# Altium PCB ETS_v8-nordic-split_1-sided-HV.PcbDoc
Units mil, origin at the board's own origin, x right, y up, seen from the top; angles counter-clockwise.
Board outline 582.68 x 326.77 mil, 2 copper layers (Top Layer, Bottom Layer), stack 62.8 mil thick; 14 components, 30 nets, 50 pads, 16 vias.
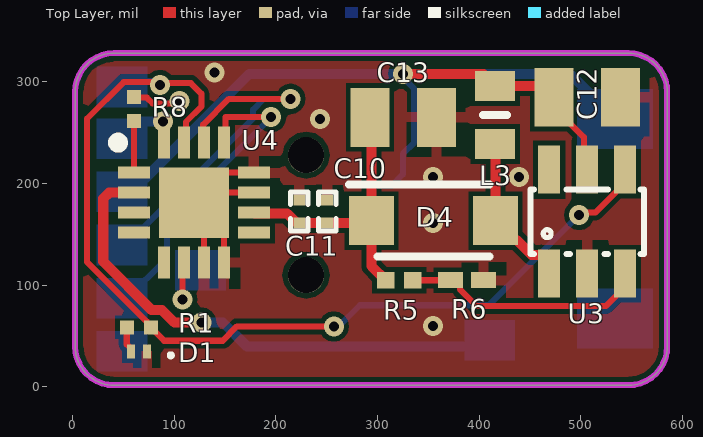
[diagram p0: Top Layer view]
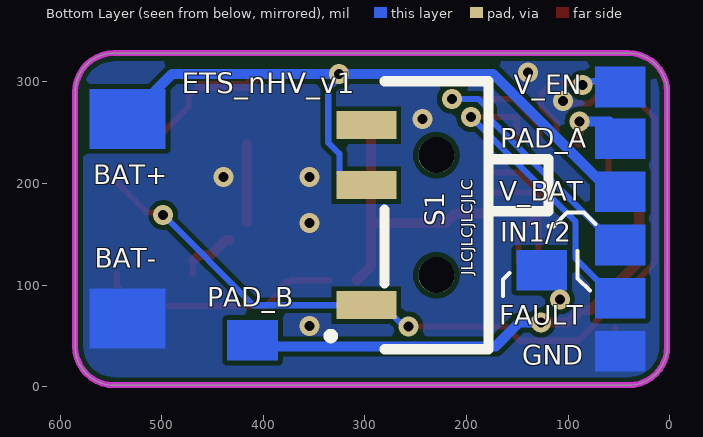
[diagram p1: Bottom Layer view, seen from below]
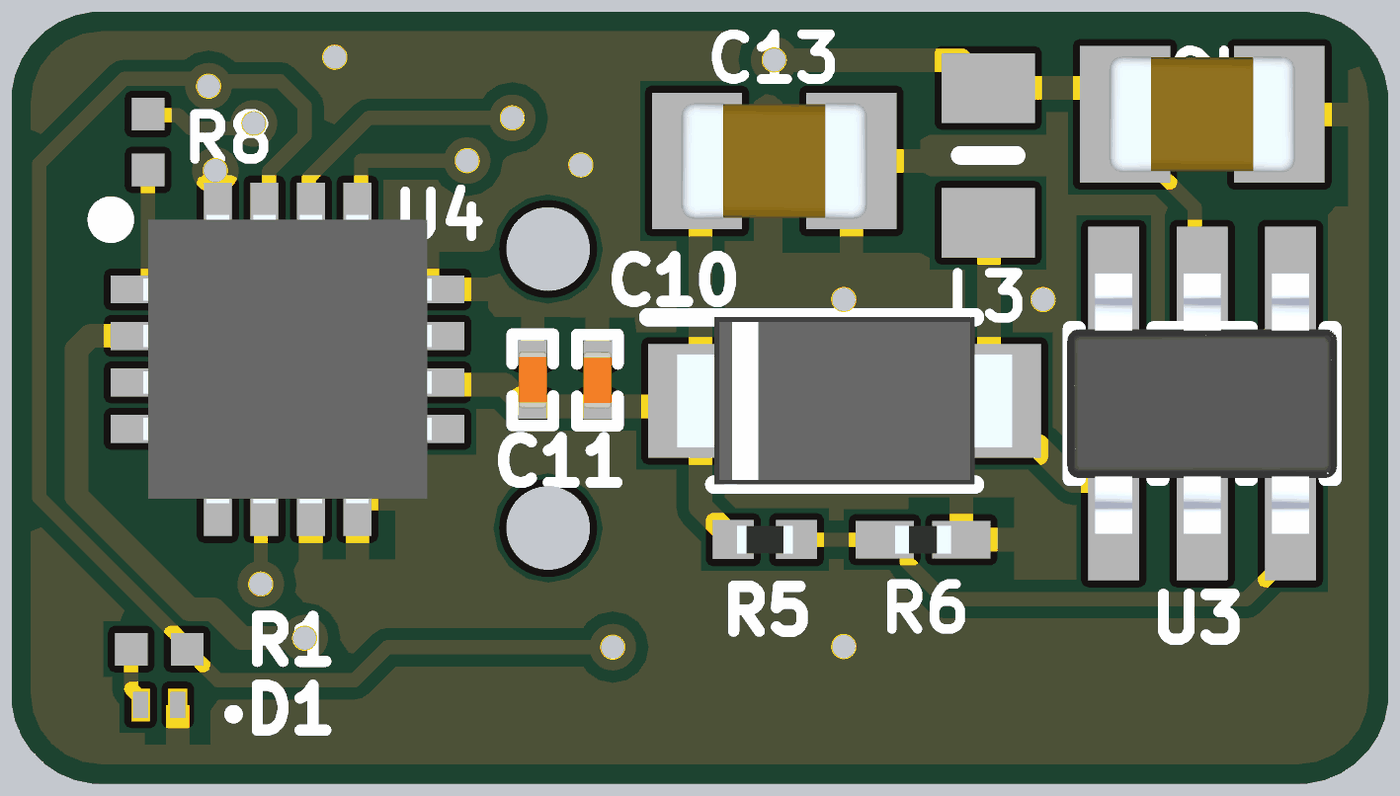
[diagram p2: 3D render of the assembled board from above, using the file's embedded part models]

## Layer stack, top to bottom
Top Solder: solder mask 0.4, Solder Resist, Dk 3.5
Top Layer: signal copper 1.4
Dielectric1: core 60, FR-4, Dk 4.8
Bottom Layer: signal copper 1.4
Bottom Solder: solder mask 0.4, Solder Resist, Dk 3.5

## Board outline
2.52,39.62 2.52,290.13 cw(c40.65,290.13) 40.65,328.26 547.08,328.26 cw(c547.08,290.13) 585.2,290.13 585.2,39.62 cw(c547.07,39.62) 547.07,1.49 40.65,1.49 cw(c40.65,39.62)

## Design rules (kind name [scope] priority, off if disabled: settings)
Clearance Polygon_ANT [(InNamedPolygon('Top_Layer-GND')) or (InNamedPolygon('Bottom_Layer-GND')) vs InNet('RF')] p1: gap=5 ignorepadtopadclearanceinfootprint=FALSE except(0: Arc-Hole Track-Hole SMDPad-Hole THPad-Hole Via-Hole Fill-Hole Poly-Hole Region-Hole Text-Hole)
Clearance Polygon [(InNamedPolygon('Top_Layer-GND')) or (InNamedPolygon('Bottom_Layer-GND')) or (InNamedPolygon('Mid_Layer_1-GND')) or (InNamedPolygon('Mid_Layer_2-GND'))] p2: gap=8 ignorepadtopadclearanceinfootprint=FALSE except(0: Arc-Hole Track-Hole SMDPad-Hole THPad-Hole Via-Hole Fill-Hole Poly-Hole Region-Hole Text-Hole)
Clearance [All] p3: gap=5 ignorepadtopadclearanceinfootprint=FALSE except(3.5: Arc-Arc Arc-Track Track-Track)
ComponentClearance [All] p1 off: gap=10 collisioncheckmode=3 verticalgap=10 showdistances=FALSE
FabricationTestPointUsage TestPointUsage [All] p1: valid=0 allowmultiple=FALSE
FabricationTestpoint Testpoint [All] p1: side=3 testpointundercomponent=TRUE minsize=40 maxsize=100 preferedsize=60 minholesize=0 maxholesize=40 preferedholesize=32 testpointgrid=1 allowsidetop=TRUE allowsidebottom=TRUE usegrid=TRUE gridtolerance=0.01
Height [All] p1 off: minheight=0 maxheight=1000 prefheight=500
HoleSize [All] p1: absolutevalues=TRUE maxlimit=248.03 minlimit=7.87 maxpercent=80.000 minpercent=20.000
HoleToHoleClearance [All] p1 off: gap=3 allowstackedmicrovias=FALSE
MinimumAnnularRing [All] p1 off: minimumring=3
PolygonConnect PolygonConnect_1 [isVia and innet(gnd)] p1: connectstyle=Direct reliefconductorwidth=10 reliefentries=4 polygonreliefangle="90 Angle" airgapwidth=10
PolygonConnect [All] p2: connectstyle=Relief reliefconductorwidth=10 reliefentries=4 polygonreliefangle="90 Angle" airgapwidth=10
RoomDefinition ETS_v8-nordic-split [InComponentClass('ETS_v8-nordic-split')] p1: confinementstyle=ConfineIn formatcopy=TRUE lockcomponents=FALSE outline -40.78,-120.56 628.51,-120.56 628.51,388.26 -40.78,388.26
RoutingVias [All] p1: holewidth=16 width=32 viastyle="Through Hole" minholewidth=3.94 minwidth=9.84 maxholewidth=28 maxwidth=50
SilkToSolderMaskClearance SilkscreenOverComponentPads [IsPad] p1: minsilkscreentomaskgap=10 clearancetoexposedcopper=TRUE
SolderMaskExpansion [All] p1: expansion=3 istentingtop=FALSE
Width [All] p1: maxlimit=100 minlimit=5 preferedwidth=6 minimp=50.000000 maximp=50.000000 favimp=50.000000
23 further rules are at their usual default settings.

## Components (designator, comment, footprint, x,y, rotation, side; value= is the part's Value field where it differs from the comment)
C10 "100nF" CAPC0603X03L_C 250.56,172.35 r90 top
C11 "100nF" CAPC0603X03L_C 223.2,172.45 r270 top
C12 "22uF" CAPC2012X145N 506.46,284.84 r0 top
C13 "22uF" CAPC2012X145N 325.36,265.11 r0 top
D1 "APG0603VGC-TT-5MAV" LED_APG0603SEC-E-TT 65.09,34.84 r180 top
D4 "SS34FA" SODFL3618X143N 355.17,163.55 r0 top
L3 "LQM18PH4R7MFRL" LQW18CA32NJ00D 415.91,267.47 r270 top
R1 "60R 1% 0201(0603)" RESC0201(0603)_L 65.09,58.46 r180 top value="1.00 Ohm"
R5 "10kR" RESC0603X26N 321.42,104.8 r180 top
R6 "4.7kR" RESC0603X28N 388.35,104.8 r180 top
R8 "120mR 1% 0201(0603)" RESC0201(0603)_L 60.41,273.14 r90 top value="1.00 Ohm"
S1 "SSSS810701" SSSS810701 298.6,198.32 r90 bottom
U3 "" *SOT23-6 506.46,162.41 r0 top
U4 "DRV8847RTER" QFN50P300X300X80-17N-D 119.46,181.2 r0 top

## Footprints (in the part's own frame and the unit in brackets; to place one, negate y for a bottom-side part, rotate by r counter-clockwise, add the part's x,y. Pads: shape width x height; smd on the part's side, far side on the other; paste and mask are expansions set on the pad)
*SOT23-6 [mm]
  rect 0.55x1.2 smd: 1(-0.95,-1.3) 2(0,-1.3) 3(0.95,-1.3) 4(0.95,1.3) 5(0,1.3) 6(-0.95,1.3)
  silkscreen extent -1.42,-0.81 1.42,0.81, body extent -1.45,-1.4 1.45,1.4, height 1.45
CAPC0603X03L_C [mm]
  rect 0.27x0.3 smd: 1(-0.285,0) 2(0.285,0)
  silkscreen extent -0.49,-0.22 0.49,0.22, body extent -0.3,-0.15 0.31,0.15, height 0.3
CAPC2012X145N [mm]
  rect 0.97x1.47 smd: 1(-0.83,0) 2(0.83,0)
  body extent -1,-0.63 1,0.63, height 1.45
LED_APG0603SEC-E-TT [mm]
  rect 0.2x0.35 smd paste-1: A(0.2,0) C(-0.2,0)
  silkscreen extent -0.85,0.05 -0.75,0.15
LQW18CA32NJ00D [mm]
  rect 0.75x1 smd: 1(-0.725,0) 2(0.725,0)
  silkscreen extent 0,-0.3 0,0.3
QFN50P300X300X80-17N-D [mm]
  rect 0.8x0.3 smd: 1(-1.5,0.75) 2(-1.5,0.25) 3(-1.5,-0.25) 4(-1.5,-0.75) 9(1.5,-0.75) 10(1.5,-0.25) 11(1.5,0.25) 12(1.5,0.75)
  rect 0.3x0.8 smd: 5(-0.75,-1.5) 6(-0.25,-1.5) 7(0.25,-1.5) 8(0.75,-1.5) 13(0.75,1.5) 14(0.25,1.5) 15(-0.25,1.5) 16(-0.75,1.5)
  rect 1.76x1.76 smd: 17(0,0)
  silkscreen extent -2.02,1.38 -1.77,1.62, body extent -1.55,-1.55 1.55,1.55, height 0.8
RESC0201(0603)_L [mm] "Chip Resistor, Body 0.6x0.3mm, IPC High Density"
  rect 0.35x0.35 smd: 1(-0.3,0) 2(0.3,0)
  body extent -0.31,-0.16 0.31,0.16, height 0.3
RESC0603X26N [mm]
  rect 0.44x0.42 smd: 1(-0.34,0) 2(0.34,0)
  body extent -0.3,-0.15 0.3,0.15, height 0.26
RESC0603X28N [mm]
  rect 0.625x0.4 smd: 1(-0.412,0) 2(0.412,0)
  body extent -0.3,-0.15 0.3,0.15, height 0.28
SODFL3618X143N [mm]
  rect 1.12x1.22 smd: 1(-1.55,0) 2(1.55,0)
  silkscreen extent -2.11,-0.9 1.4,0.9, body extent -1.8,-0.9 1.8,0.9, height 1.43
SSSS810701 [mm]
  rect 0.7x1.5 smd: 1(-3,0) 2(0,0) 3(1.5,0)
  round 0.9 hole 0.9 unplated: 4(-2.25,-1.75) 5(0.75,-1.75)
  silkscreen extent -4.1,-4.55 2.6,0.94

## Part data
C10: "Capacitor, X5R, ±10%", Part Number=C0201-100n, Footprint Doc=0201, LatestRevisionDate=2017-11-09, Pin Count=2, Published=2014-11-13, Publisher="Nordic Semiconductor"
C11: library part GRM188R61C106KAALD, "Capacitor", Manufacturer_Name="Murata Electronics", Datasheet Link=https://psearch.en.murata.com/capacitor/product/GRM188R61C106KAAL%23.html, Height=0.9mm, Manufacturer_Part_Number=GRM188R61C106KAALD
C12 C13: library part GRM21BR61E226ME44K, "Capacitor", Manufacturer_Name="Murata Electronics", Datasheet Link=http://www.murata.com/~/media/webrenewal/support/library/catalog/products/capacitor/mlcc/c02e.pdf, Height=1.45mm, Manufacturer_Part_Number=GRM21BR61E226ME44K
D1: library part APG0603SEC-E-TT, "Green 527nm LED Indication - Discrete 3V 2-SMD, 0201", Package="0201 Kingbright", Availability=Unavailable, MF=Kingbright, MP=APG0603SEC-E-TT, Price=None, SnapEDA_Link=https://www.snapeda.com/parts/APG0603SEC-E-TT/Kingbright/view-part/2754377/?ref=snap
D4: "Schottky Diode", Manufacturer_Name="ON Semiconductor", Mouser2 Part Number=512-SS34FA, Datasheet Link=https://componentsearchengine.com/Datasheets/1/SS34FA.pdf, Height=1.43mm, Manufacturer_Part_Number=SS34FA, Mouser2 Price/Stock=https://www.mouser.com/Search/Refine.aspx?Keyword=512-SS34FA
L3: "Inductor", Manufacturer_Name="Murata Electronics", Mouser2 Part Number=81-LQM18PH4R7MFRL, Datasheet Link=https://psearch.en.murata.com/inductor/product/LQM18PH4R7MFR%23.html, Height=0.95mm, Manufacturer_Part_Number=LQM18PH4R7MFRL, Mouser2 Price/Stock=https://www.mouser.com/Search/Refine.aspx?Keyword=81-LQM18PH4R7MFRL
R1 R8: library part CMP-1010-00171-1, "1R 0.05W 1% 0201 (0603 Metric)  SMD", Case-EIA=0201, Case-Metric=0603, Power="0.05 W", Tolerance="1 %", Technology=SMT
R5: library part RC0201FR-07100KL, "Resistor", Manufacturer_Name="YAGEO (PHYCOMP)", Datasheet Link=http://www.yageo.com/documents/recent/PYu-RC0201_51_RoHS_L_8.pdf, Height=0.26mm, Manufacturer_Part_Number=RC0201FR-07100KL
R6: library part CRCW02014K70FKED, "Resistor", Manufacturer_Name=Vishay, Datasheet Link=http://www.vishay.com/docs/20035/dcrcwe3.pdf, Height=0.28mm, Manufacturer_Part_Number=CRCW02014K70FKED
S1: "Switch", Manufacturer_Name=ALPS, Mouser2 Part Number=688-SSSS810701, Datasheet Link=https://componentsearchengine.com/Datasheets/1/SSSS810701.pdf, Manufacturer_Part_Number=SSSS810701, Mouser2 Price/Stock=https://www.mouser.com/Search/Refine.aspx?Keyword=688-SSSS810701
U3: library part MT3608, "High Efficiency 1.2MHz / 2A Step Up Converter", SnapEDA_Link=https://www.snapeda.com/parts/MT3608/Aerosemi%20Technology%20Co.%2C%20Ltd/view-part/3218014/?ref=snap
U4: "Integrated Circuit", Manufacturer_Name="Texas Instruments", Mouser2 Part Number=595-DRV8847RTER, Datasheet Link=http://www.ti.com/lit/gpn/DRV8847, Height=0.8mm, Manufacturer_Part_Number=DRV8847RTER, Mouser2 Price/Stock=https://www.mouser.com/Search/Refine.aspx?Keyword=595-DRV8847RTER

## Via types
v1: diameter 19.68, hole 9.84, Top Layer to Bottom Layer, tented both sides, 16 vias

## Nets (pads, with @x,y where several pads share a name; then routed paths per layer and width w, separated by ;. In a path a pad name is that pad's centre, name@x,y a point inside that pad or via, vN(x,y) a via of type N, cw(c..) or ccw(c..) an arc to the next point about the centre after c; other vN are vias at no path point)
DEC1: 
DEC2: 
DEC4: 
GND: C10.2 C11.1 C12.2 C13.2 D1.C R6.1 R8.2 U3.2 U4.7 U4.8 U4.11 U4.12 U4.17 | length 289.1
  Top Layer w6: R8.2 60.86,284.5 73.04,284.5 78.62,278.92 103.08,278.92 v1(105.18,281.02) ; U4.7 U4.17@129.31,171.36 ; U4.8 148.99,151.67 U4.17@129.31,171.36 ; U4.11 U4.17@129.31,191.04 ; U4.12 148.99,210.73 U4.17@129.31,191.04 ; U4.17@129.31,171.36 U4.17 U4.17@129.31,191.04
  other v1: 354.83,59.57 354.83,161.13 354.83,206.45 439.16,206.45 243.56,263.41 139.44,309.06
HV: C10.1 C11.2 C13.1 D4.1 R5.2 U4.10 | length 284.5
  Top Layer w6: C11.2 C11.2@223.25,161.18 ; C10.1@250.51,161.18 C10.1 ; C13.1 C13.1@294.14,263.65
  Top Layer w10: U4.10 179.42,170.45 194.01,170.45 194.04,170.42 211.12,170.42 C11.2@220.19,161.34 ; C11.2@223.25,161.18 C10.1@250.51,161.18 ; C10.1 291.73,161.13 D4.1 ; C13.1@294.14,263.65 D4.1 ; R5.2 294.14,118.69 D4.1
NetC3_2: 
NetD1_A: D1.A R1.2 | length 25.3
  Top Layer w6: R1.2 53.28,41.73 57.22,37.79 D1.A
NetD2_A: 
NetD3_3: 
NetD4_2: D4.2 L3.2 U3.1 | length 145.7
  Top Layer w6: L3.2 L3.2@416.19,238.65 ; U3.1@461.23,131.85 469.06,124.02 469.06,123.82 U3.1
  Top Layer w10: D4.2@416.19,161.58 D4.2 L3.2@416.19,238.65 ; D4.2@433.24,144.53 436.94,144.53 451.82,129.65 463.23,129.65 U3.1@469.06,123.82
NetL1_1: 
NetR5_1: R5.1 R6.2 U3.3 | length 240.4
  Top Layer w6: R5.1 R6.2 ; R6.2@373.74,103.18 378.18,103.18 381.43,99.93 381.43,95.48 397.32,79.6 525.04,79.6 543.86,98.43 U3.3
NetR8_1: R8.1 U4.1 | length 50.6
  Top Layer w6: U4.1 R8.1
P0.03/AIN1: 
P0.05/AIN3: 
P0.08: 
P0.12: U4.6 | length 73.3
  Top Layer w6: v1(108.1,85.99) 108.1,120.62 U4.6
  Bottom Layer w6: v1(108.1,85.99) 108.1,99.19 124.57,115.66
P0.15: U4.14 | length 344.2
  Top Layer w6: U4.14 128.39,241.18 128.39,257.97 153.76,283.35 v1(214.54,283.35)
  Bottom Layer w6: 49.58,139.28 52.46,139.28 177.59,264.42 177.59,272.66 188.28,283.35 v1(214.54,283.35)
P0.16: U4.13 | length 312
  Top Layer w6: U4.13 150.57,241.83 150.57,265.27 v1(195.44,265.27)
  Bottom Layer w6: 49.77,85.47 51.97,85.47 92.95,126.44 92.95,162.78 v1(195.44,265.27)
P0.20: 
PAD_A: U4.16 | length 70.4
  Top Layer w10: v1(88.87,261.08) 89.69,261.08 89.69,240.5 U4.16
  Bottom Layer w10: 45.83,247.47 59.44,261.08 v1(88.87,261.08)
PAD_B: U4.2 | length 510.1
  Top Layer w10: U4.2 35.94,191.04 30.08,185.18 30.08,123.16 77.9,75.35 87.93,75.35 100.16,63.12 v1(126.67,63.12)
  Bottom Layer w6: 404.68,42.7 408.04,46.06
  Bottom Layer w10: v1(126.67,63.12) 148.06,63.12 171.73,39.45 401.43,39.45 404.68,42.7
RF: 
SWDCLK: 
SWDIO: 
VDD_NRF: 
VIN_BAT: C12.1 L3.1 S1.2 U3.5 | length 865.3
  Top Layer w6: v1(325.36,307.89) v1@325.47,307.78 ; C12.1@462.61,296.02 C12.1 473.78,275 503.27,245.51 503.27,237.71
  Top Layer w10: v1@325.47,307.78 404.15,307.78 L3.1 C12.1@462.61,296.02
  Bottom Layer w6: S1.2 314.35,198.32 325.13,209.1 325.13,229.28 336.13,240.28 336.13,293.42 325.36,304.18 v1(325.36,307.89)
  Bottom Layer w10: 70.87,204.72 174.03,307.89 v1(325.36,307.89) 489.61,307.89 523.31,274.19
VIN_EN: R1.1 S1.1 U3.4 U4.15 | length 997.2
  Top Layer w6: U4.15 111.58,242.21 111.58,260.68 126.67,275.77 126.67,288.41 116.21,298.86 88.11,298.86 v1(86.01,296.76) 82.94,299.84 50.21,299.84 14.34,263.97 14.34,122.65 73.01,63.97 73.01,62.35 90.08,45.28 147.73,45.28 161.75,59.3 v1(257.05,59.3) ; v1(498.59,169.04) 501.21,171.66 514.73,171.66 543.86,200.79 U3.4
  Bottom Layer w6: 60.41,300.68 82.1,300.68 v1(86.01,296.76) ; v1(257.05,59.3) 261.94,59.3 282.85,80.21 S1.1 409.75,80.21 v1(498.59,169.04)
XC1: 
XC2: 
pads on no net: S1.3 S1.4 S1.5 U3.6 U4.3 U4.4 U4.5 U4.9

## Polygon pours and split planes (outlines as drawn)
GND on Top Layer "Top Layer-GND" (solid, pour order 16): 2.52,1.49 585.2,1.49 585.2,328.26 2.52,328.26
GND on Bottom Layer "Bottom Layer-GND" (solid, pour order 18): 2.52,1.49 2.52,328.26 585.2,328.26 585.2,1.49

## Keep-outs
Keep-Out Layer:
  the board outline again, w6

## Other copper
Bottom Layer:
  rectangle net PAD_B: 385.6,25.58 435.6,65.58
  rectangle net VIN_BAT: 496.23,234.21 571.23,293.26
  rectangle net P0.12: 100.95,94.66 150.95,134.66
  rectangle net GND: 496.23,37.59 571.23,96.65
  rectangle net PAD_A: 23.67,224.13 73.67,264.13
  rectangle net GND: 23.67,14.84 73.67,54.84
  rectangle net P0.16: 23.67,67.16 73.67,107.16
  rectangle net P0.15: 23.67,119.48 73.67,159.48
  rectangle net VIN_BAT: 23.67,171.81 73.67,211.81
  rectangle net VIN_EN: 23.67,274.99 73.67,314.99

## Silkscreen, mask and mechanical layers (free items; w line width, h text height)
Bottom Overlay:
  lines w4: 73.16,159.99 84.53,171.36 101.16,171.36 114.6,157.92 119.33,157.92 ; 78.71,94.75 90.62,106.65 90.62,133.65 ; 157.8,111.83 163.94,105.69 163.94,89.35
  text "ETS_nHV_v1" at 480.32,288.9 h20
  text "V_EN" at 153.75,287.73 h19
  text "PAD_A" at 166.91,235.03 h19
  text "BAT+" at 567.42,199.39 h19
  text "V_BAT" at 167.73,182.97 h19
  text "IN1/2" at 166.91,142.47 h19
  text "BAT-" at 566,117.25 h19
  text "JLCJLCJLCJLC" at 189.86,109.65 h19 r270
  text "PAD_B" at 455.22,78.64 h19
  text "FAULT" at 167.73,61.03 h19
  text "GND" at 144.99,21.62 h19
Mechanical 1:
  the board outline again, w6

## Dimensions
667.88,328.26 to 667.88,-77.25 on Mechanical 3
6.46,-77.25 to 667.88,-77.25 on Mechanical 3